# Altium PCB BTL-TKHT do.PcbDoc
Units mil, origin at the board's own origin, x right, y up, seen from the top; angles counter-clockwise.
Board outline 3880.03 x 2310.03 mil, 2 copper layers (Top Layer, Bottom Layer); 31 components, 26 nets, 131 pads, 0 vias.
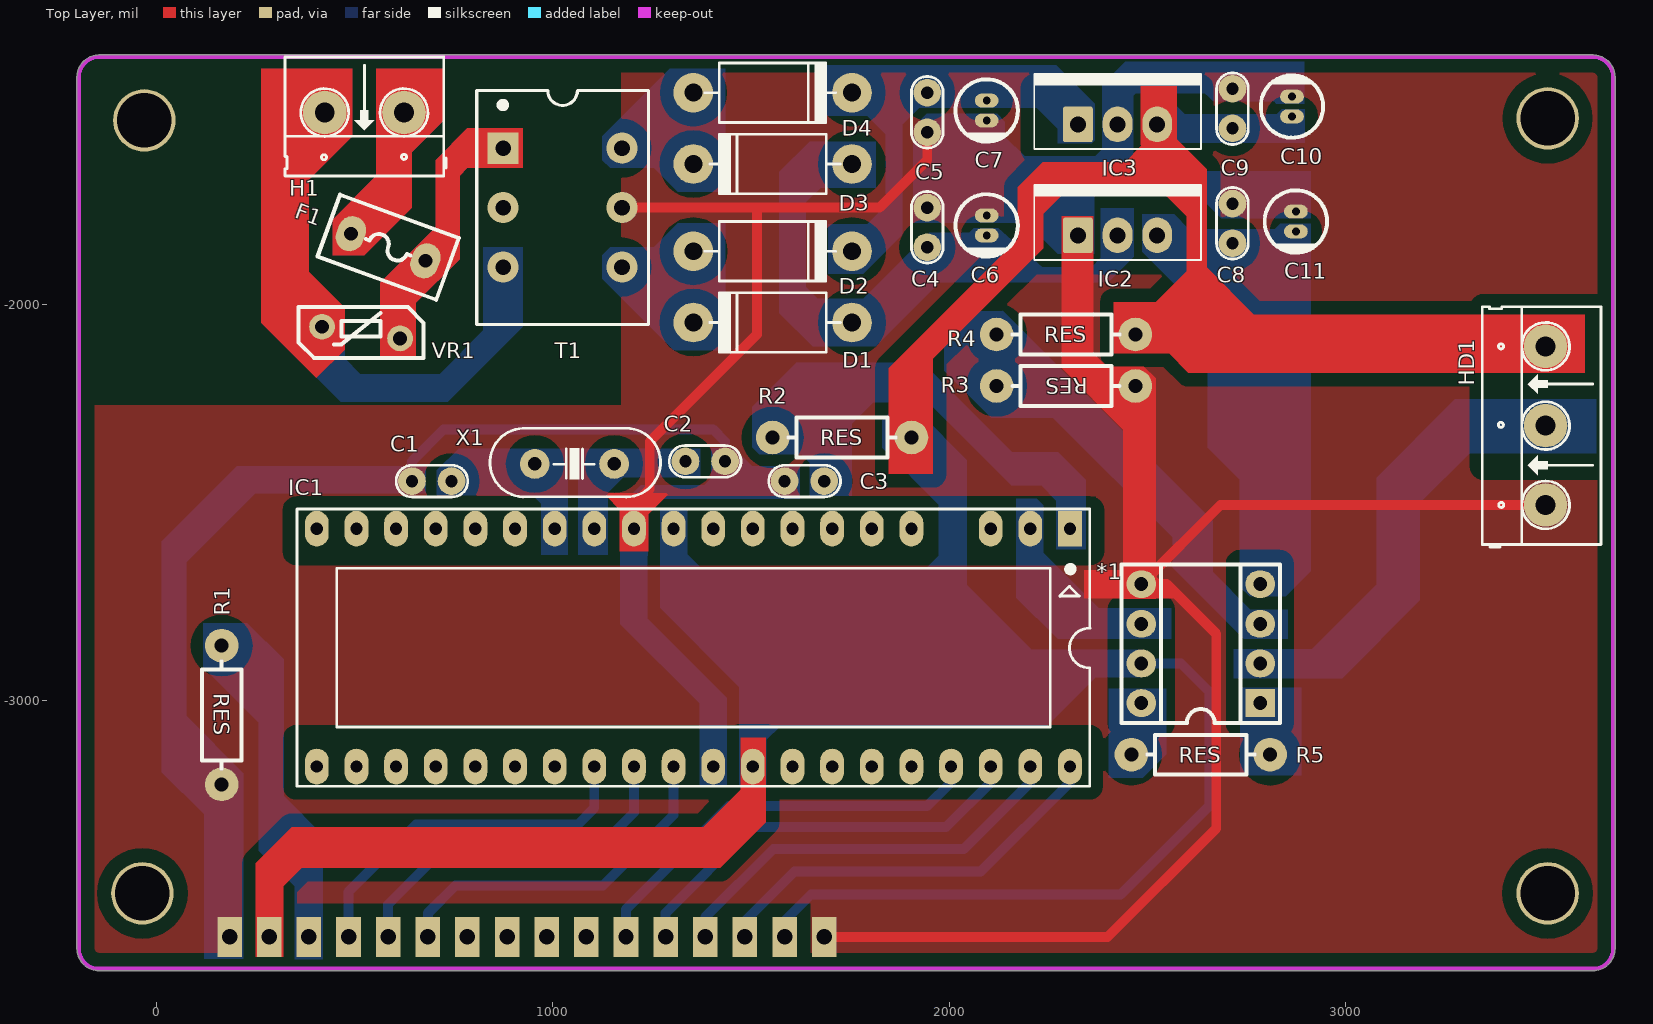
[diagram p0: Top Layer view]
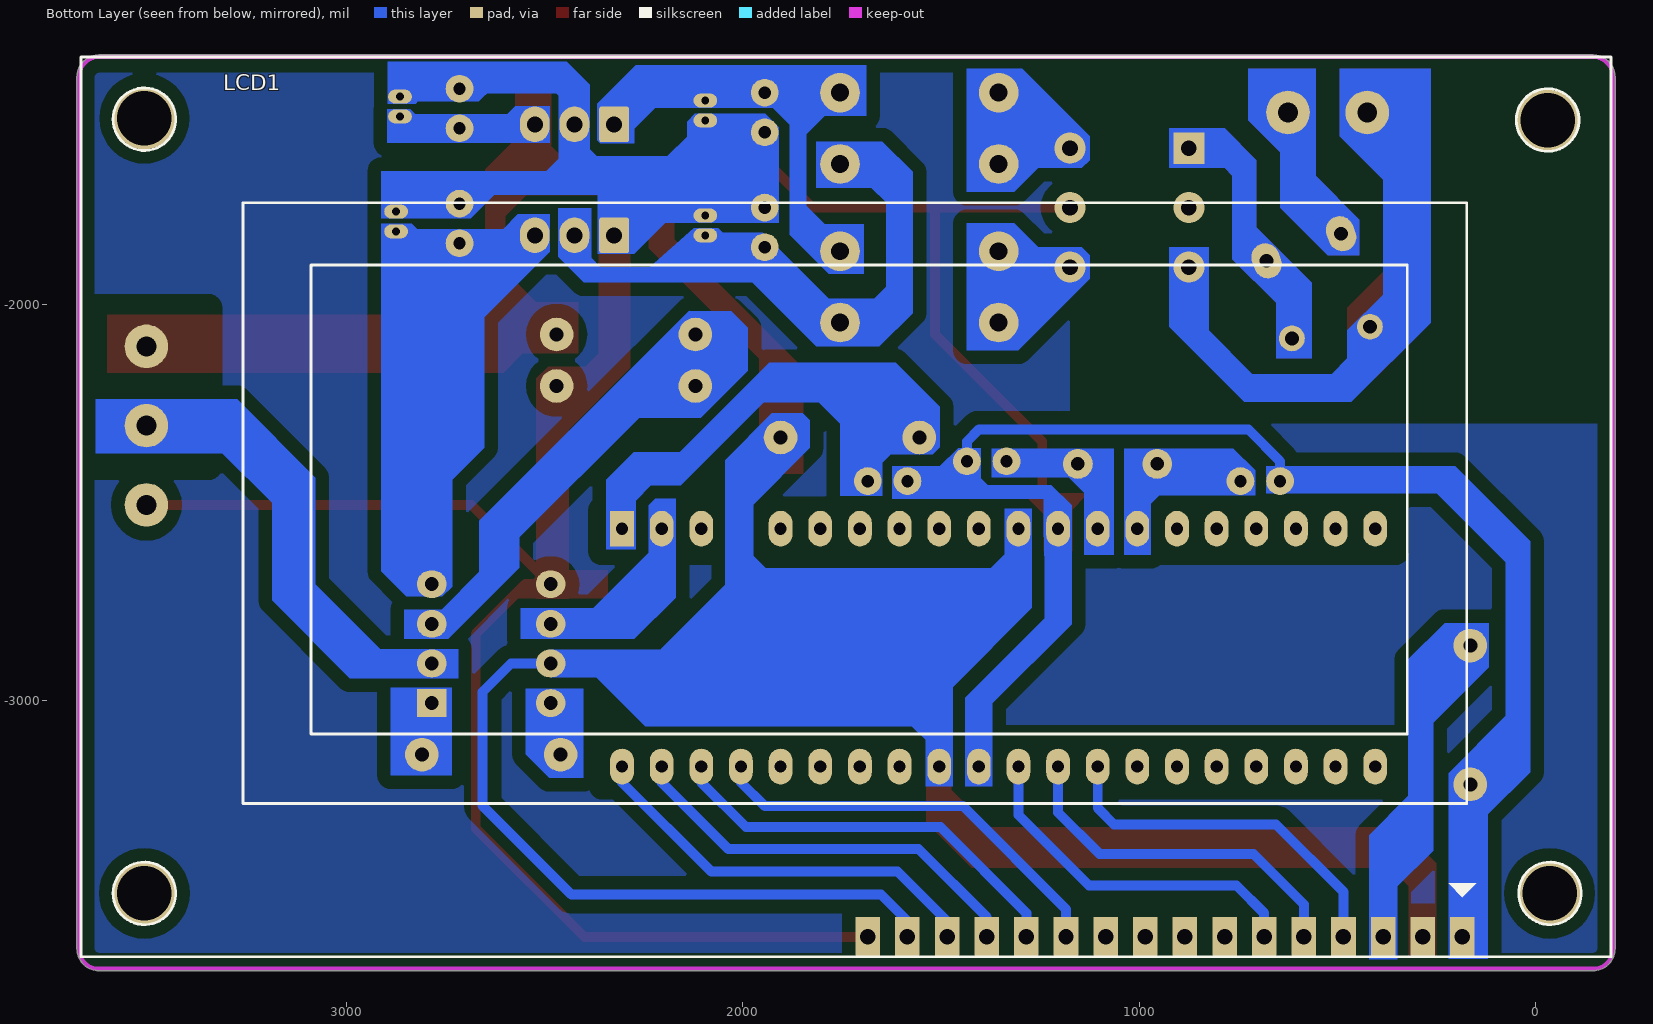
[diagram p1: Bottom Layer view, seen from below]
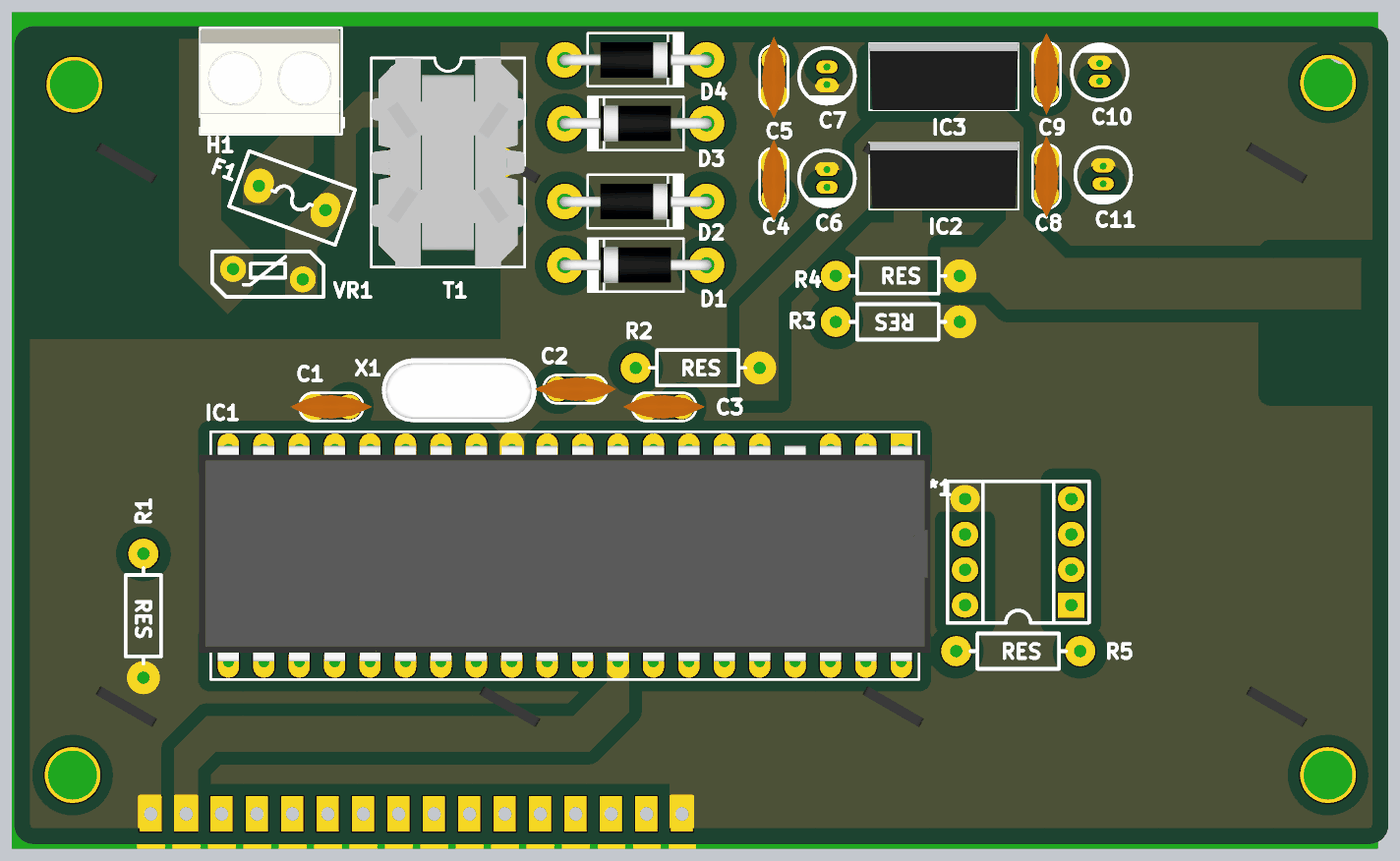
[diagram p2: 3D render of the assembled board from above, using the file's embedded part models]

## Layer stack, top to bottom
Top Solder: solder mask 0.4, Solder Resist, Dk 3.5
Top Layer: signal copper 1.4
Dielectric 1: dielectric 12.6, FR-4, Dk 4.8
Bottom Layer: signal copper 1.4
Bottom Solder: solder mask 0.4, Solder Resist, Dk 3.5

## Board outline
-145,-3681.01 cw(c-145,-3626) -200.02,-3626 -200.02,-1426 cw(c-145,-1426) -145,-1370.98 3625,-1370.98 cw(c3625,-1426) 3680.02,-1426 3680.02,-1576 cw(c3675,-1576) 3680.01,-1576.03 3680.02,-3626 cw(c3625,-3626) 3625,-3681.01

## Design rules (kind name [scope] priority, off if disabled: settings)
Clearance [All] p1: gap=35 ignorepadtopadclearanceinfootprint=FALSE
PlaneConnect [All] p1: planeconnectstyle=Direct reliefexpansion=20 reliefentries=4 reliefconductorwidth=10 reliefairgap=10
PolygonConnect [All] p1: connectstyle=Direct reliefconductorwidth=10 reliefentries=4 polygonreliefangle="90 Angle" airgapwidth=10
RoutingVias [All] p1: holewidth=28 width=50 viastyle="Through Hole" minholewidth=28 minwidth=50 maxholewidth=28 maxwidth=50
SolderMaskExpansion [All] p1: expansion=4
Width [All] p1: maxlimit=25 minlimit=15 preferedwidth=20 minimp=50.000000 maximp=50.000000 favimp=50.000000
29 further rules are at their usual default settings.

## Components (designator, comment, footprint, x,y, rotation, side; value= is the part's Value field where it differs from the comment)
*1 "INA128" INA128 2685,-2906 r180 top (schematic designator *)
C1 "Cap" Cap 695,-2446 r0 top (schematic designator C11)
C2 "Cap" Cap 1385,-2396 r180 top (schematic designator C10)
C3 "33uF" Cap 1635,-2446 r0 top (schematic designator C9)
C4 "1uF" Cap 1945,-1806 r90 top (schematic designator C5)
C5 "1uF" Cap 1945,-1516 r90 top (schematic designator C1)
C6 "33uF" POL_160mil 2095,-1801 r270 top
C7 "33uF" POL_160mil 2095,-1511 r270 top (schematic designator C2)
C8 "1uF" Cap 2715,-1796 r90 top
C9 "1uF" Cap 2715,-1506 r270 top (schematic designator C4)
C10 "33uF" POL_160mil 2865,-1501 r90 top (schematic designator C3)
C11 "33uF" POL_160mil 2875,-1791 r270 top (schematic designator C7)
D1 "Diode" Diode 1555,-2046 r90 top
D2 "Diode" Diode 1555,-1866 r270 top
D3 "Diode" Diode 1555,-1646 r90 top
D4 "Diode" Diode 1555,-1466 r270 top
F1 "Fuse" PUSE_3 585,-1856 r340 top (schematic designator F2)
H1 "HD_2" "Header 2" 525,-1476 r180 top
HD1 "HD_3" HEADER_3 4005,-2206 r90 top
IC1 "PIC 16F877A" DIP40/W0.6 2305,-2566 r180 top value=PIC16F877A (schematic designator IC3)
IC2 "LM7905" LM7905 2425,-1826 r0 top
IC3 "LM7805" LM7805 2425,-1546 r0 top (schematic designator IC1)
LCD1 "LCD 20x4A" LCD20X4A 185,-3596 r0 bottom (schematic designator LCD)
R1 "2.5k" RES 165,-3036 r270 top (schematic designator R4)
R2 "10k" RES 1730,-2336 r0 top (schematic designator R1)
R3 "120R" RES 2295,-2206 r180 top
R4 "120R" RES 2295,-2076 r0 top (schematic designator R2)
R5 "15R" RES 2635,-3136 r0 top
T1 "Transformer 2P3S" Transformer_3 1025,-1756 r0 top
VR1 "Varistor 360V" VARISTOR 516.57,-2071.24 r180 top
X1 "12Mhz" XT2 1055,-2402.69 r0 top value=4Mhz

## Footprints (in the part's own frame and the unit in brackets; to place one, negate y for a bottom-side part, rotate by r counter-clockwise, add the part's x,y. Pads: shape width x height; smd on the part's side, far side on the other; paste and mask are expansions set on the pad)
Cap [mil]
  round 70 hole 31: 1(-50,0) 2(50,0)
  silkscreen extent -90,-40 91,40, body extent -115,-33 115,33, height 265
Diode [mil]
  round 100 hole 45: A(0,-200) C(0,200)
  silkscreen extent -75,-171 75,159, body extent -50,-215 51,215, height 100
DIP40/W0.6 [mil] "40 PIN, W 600mil, Pin to pin 100mil"
  rect 60x90 hole 31: 1(0,0)
  oval 60x90 hole 31: 2(100,0) 3(200,0) 5(400,0) 6(500,0) 7(600,0) 8(700,0) 9(800,0) 10(900,0) 11(1000,0) 12(1100,0) 13(1200,0) 14(1300,0) 15(1400,0) 16(1500,0) 17(1600,0) 18(1700,0) 19(1800,0) 20(1900,0) 21(1900,600) 22(1800,600) 23(1700,600) 24(1600,600) 25(1500,600) 26(1400,600) 27(1300,600) 28(1200,600) 29(1100,600) 30(1000,600) 31(900,600) 32(800,600) 33(700,600) 34(600,600) 35(500,600) 36(400,600) 37(300,600) 38(200,600) 39(100,600) 40(0,600)
  round 0 on Top Paste: ""(300,0)
  silkscreen extent -50,-50 1950,650, body extent -82,-10 1982,600, height 224
"Header 2" [mil]
  round 110 hole 50: 1(-100,40) 2(100,40)
  silkscreen extent -206,-100 200,200, body extent -194,-95 200,200, height 394
HEADER_3 [mil]
  round 110 hole 50: 1(-300,500) 2(-100,500) 3(100,500)
  silkscreen extent -406,360 200,660, body extent -395,360 195,655, height 394
INA128 [mil]
  rect 75x70 hole 35: 1(-100,100)
  oval 75x70 hole 35: 2(-100,0) 3(-100,-100) 4(-100,-200) 5(200,-200) 6(200,-100) 7(200,0) 8(200,100)
  silkscreen extent -150,-250 250,150
LCD20X4A [mil] "LCD dipslay 20x4, 16 pin"
  rect 62x100 hole 39: 1(0,0) 2(100,0) 3(200,0) 4(300,0) 5(400,0) 6(500,0) 7(600,0) 8(700,0) 9(800,0) 10(900,0) 11(1000,0) 12(1100,0) 13(1200,0) 14(1300,0) 15(1400,0) 16(1500,0)
  round 157.48 hole 137.8: "Hole 0"(-220,-110) "Hole 0"(-215,-2060) "Hole 0"(3325,-2065) "Hole 0"(3325,-110)
  silkscreen extent -375,-2220 3485,50, body extent -392,-2264 3466,98, height 517
LM7805 [mil]
  rrect15% 75x90 hole 40 paste-73.23: 1(-100,0)
  oval 75x90 hole 40 paste-73.23: 2(0,0) 3(100,0)
  silkscreen extent -210,-63 210,127, body extent -210,-61 210,129, height 900
LM7905 [mil]
  rrect15% 75x90 hole 40 paste-73.23: 1(-100,0)
  oval 75x90 hole 40 paste-73.23: 2(0,0) 3(100,0)
  silkscreen extent -210,-63 210,127, body extent -210,-61 210,129, height 900
POL_160mil [mm]
  oval 0.9x1.524 hole 0.5: +(-0.635,0) -(0.635,0)
  silkscreen extent -2,-2 2,2
PUSE_3 [mil]
  oval 70x90 hole 35: 1(-100,0) 2(100,0)
  silkscreen extent -160,-83 159,83
RES [mil]
  round 85 hole 35: 1(-175,0) 2(175,0)
  silkscreen extent -135,-50 135,50
Transformer_3 [mm] "size 12x15mm"
  rect 2x2 hole 1: 1(-3.81,3.81)
  round 2 hole 1: 2(-3.81,0) 3(-3.81,-3.81) 4(3.81,-3.81) 5(3.81,0) 6(3.81,3.81)
  silkscreen extent -5.5,-7.5 5.5,7.5, body extent -5.5,-7.5 5.5,7.5, height 16.8
VARISTOR [mil]
  round 65 hole 35: 1(-98.43,14.76) 2(98.43,-14.76)
  silkscreen extent -157,-64 157,64
XT2 [mil] "Footpin for Crystal 2 pin"
  round 75 hole 34: 1(-100,0) 2(100,0)
  silkscreen extent -213,-83 217,90, body extent -216,-87 216,90, height 144

## Part data
C3 C4 C5 C8 C9: library part Cap
C6 C7 C10 C11: library part Pol-Cap, "T? di?n phân c?c"
IC1: library part PIC16F877-PU, "8K FLASH, 368B RAM, 256B EFROM", Copyright by=VanDungEvn
IC2: "Input Voltage: -7 - 35V, Ouput Voltage: -5V"
IC3: "Input Voltage: 7 - 35V, Ouput Voltage: 5V"
LCD1: library part LCD20x4A, "LCD dipslay 20 char, 4 line"
R1 R2 R3 R4 R5: library part RES, "di?n tr? size nh?"
VR1: library part Varistor
X1: library part XT2, "Crystal, 32.768 KHz, -40 to 85 degC, 3.2 x 1.5 x 0.9 mm SMD"

## Nets (pads, with @x,y where several pads share a name; then routed paths per layer and width w, separated by ;. In a path a pad name is that pad's centre, name@x,y a point inside that pad or via, vN(x,y) a via of type N, cw(c..) or ccw(c..) an arc to the next point about the centre after c; other vN are vias at no path point)
+5: *1.7 C9.2 C10.+ HD1.3 IC1.11 IC1.32 IC3.3 LCD1.2 LCD1.15 R2.2 R4.2 | length 8814.5
  Top Layer w25: LCD1.2 285,-3486 386,-3385 1399,-3385 1505,-3279 IC1.32 ; R2.2 1905,-2139 2205,-1839 2205,-1744 2243,-1706 2445,-1706 2525,-1626 IC3.3@2525,-1587 ; R4.2 2775,-2076 ; IC3.3 IC3.3@2525,-1587 ; HD1.3 3475,-2076 2775,-2076 ; IC3.3@2525,-1587 2625,-1687 2625,-1926 2775,-2076
  Bottom Layer w25: IC1.11 1305,-2746 1505,-2946 ; IC1.32 1505,-2946 ; LCD1.15 1585,-3556 1652,-3489 2433,-3489 2657,-3265 2657,-2978 2585,-2906 *1.7 1735,-2906 ; R2.2 2005,-2436 2005,-2636 1735,-2906 ; IC3.3 2535,-1556 C9.2 2835,-1556 C10.+ ; 1505,-2946 1695,-2946 1735,-2906
-5: *1.4 C8.1 C11.- IC2.3 | length 1259.7
  Bottom Layer w25: IC2.3 2545,-1846 C8.1 ; *1.4 2785,-1916 C8.1 ; C11.- 2845,-1846 C8.1
_toADC: *1.6 IC1.2 | length 438
  Bottom Layer w25: IC1.2 2205,-2666 2345,-2806 *1.6
D4: IC1.37 LCD1.11 | length 1062.5
  Bottom Layer w25: LCD1.11 1185,-3526 1445,-3266 1945,-3266 2005,-3206 IC1.37
D5: IC1.38 LCD1.12 | length 1056.7
  Bottom Layer w25: LCD1.12 1285,-3536 1502,-3319 1992,-3319 2105,-3206 IC1.38
D6: IC1.39 LCD1.13 | length 1050.8
  Bottom Layer w25: LCD1.13 1385,-3546 1557,-3374 2037,-3374 2205,-3206 IC1.39
D7: IC1.40 LCD1.14 | length 1045
  Bottom Layer w25: LCD1.14 1485,-3556 1610,-3431 2080,-3431 2305,-3206 IC1.40
EN: IC1.30 LCD1.6 | length 904.7
  Bottom Layer w25: LCD1.6 685,-3536 755,-3466 1127,-3466 1305,-3288 IC1.30
GND: *1.5 C1.1 C2.1 C3.1 C4.2 C5.1 C6.+ C7.- C8.2 C9.1 C10.- C11.+ HD1.1 IC1.12 IC1.31 IC2.1 IC3.2 LCD1.1 LCD1.16 R1.2 R3.1 T1.5 | length 11861.8
  Top Layer w25: T1.5 1515,-1756 ; IC1.12 1205,-2506 1245,-2466 1245,-2346 1515,-2076 1515,-1756 ; LCD1.16 2400,-3596 2674,-3322 2674,-2831 2549,-2706 *1.5 ; C5.1 1945,-1636 1825,-1756 1515,-1756 ; IC2.1 2325,-2126 2405,-2206 R3.1 2470,-2691 *1.5 ; HD1.1 2685,-2506 *1.5
  Bottom Layer w25: LCD1.1 165,-3576 R1.2 55,-3101 55,-2636 245,-2446 C1.1 645,-2396 725,-2316 1405,-2316 1435,-2346 C2.1 ; IC1.31 1405,-2996 1205,-2796 IC1.12 1205,-2506 1235,-2476 1395,-2476 1435,-2436 C2.1 ; C3.1 1485,-2446 C2.1 ; C7.- 2065,-1566 ; IC2.1 2275,-1776 C6.+ 2075,-1756 C4.2 C5.1 2065,-1566 ; C10.- 2845,-1456 C9.1 2465,-1456 2425,-1496 IC3.2 2425,-1616 2395,-1646 ; C11.+ 2855,-1746 C8.2 2665,-1696 2445,-1696 2395,-1646 ; 2065,-1566 2145,-1646 2395,-1646
Net*_1: *1.1 R5.2 | length 140.4
  Bottom Layer w25: *1.1 2785,-3111 R5.2
Net*_8: *1.8 R5.1 | length 140.4
  Bottom Layer w25: R5.1 2485,-3111 *1.8
NetC1_2: C5.2 C7.+ D2.C D4.C IC3.1 | length 1094.3
  Bottom Layer w25: D2.C 1865,-1756 1865,-1576 D4.C C5.2 2075,-1466 C7.+ 2265,-1486 IC3.1
NetC5_1: C4.1 C6.- D1.A D3.A IC2.2 | length 1482
  Bottom Layer w25: D3.A 1682,-1646 1607,-1721 1607,-1972 1681,-2046 D1.A C4.1 2065,-1856 C6.- 2195,-1926 2375,-1926 2425,-1876 IC2.2
NetC9_2: C3.2 IC1.1 R2.1 | length 1198.1
  Bottom Layer w25: C3.2 1685,-2386 1635,-2336 R2.1 1665,-2226 1977,-2226 2167,-2416 2225,-2416 2305,-2496 IC1.1 IC1.1@2295,-2566
NetC10_2: C2.2 IC1.13 X1.2 | length 366.8
  Bottom Layer w25: IC1.13 1105,-2452.69 X1.2 1328.31,-2402.69 C2.2
NetC11_2: C1.2 IC1.14 X1.1 | length 412
  Bottom Layer w25: C1.2 911.69,-2446 X1.1 1005,-2452.69 IC1.14
NetD1_C: D1.C D2.A T1.4 | length 376.6
  Bottom Layer w25: T1.4 1315,-1906 D2.A D1.C
NetD3_C: D3.C D4.A T1.6 | length 376.6
  Bottom Layer w25: T1.6 1315,-1606 D3.C D4.A
NetF2_1: F1.1 H1.1 | length 349.7
  Bottom Layer w25: F1.1@505,-1816 605,-1716 605,-1536 H1.1
NetF2_2: F1.2 T1.1 VR1.1 | length 640.4
  Bottom Layer w25: VR1.1 615,-1966 705,-1876 745,-1836 745,-1646 785,-1606 T1.1
NetH1_2: H1.2 T1.3 VR1.2 | length 1396.5
  Bottom Layer w25: H1.2 355,-1586 355,-2006 405.47,-2056.47 VR1.2 418.15,-2139.15 495,-2216 725,-2216 795,-2146 795,-2116 875,-2036 T1.3
NetLCD_3: LCD1.3 R1.1 | length 826.1
  Bottom Layer w25: R1.1 285,-2981 285,-3318 385,-3418 LCD1.3
RS: IC1.28 LCD1.4 | length 926.4
  Bottom Layer w25: LCD1.4 485,-3482 655,-3312 1064,-3312 1105,-3271 IC1.28
RW: IC1.29 LCD1.5 | length 914.1
  Bottom Layer w25: LCD1.5 585,-3514 712,-3387 1100,-3387 1205,-3282 IC1.29
SIGNAL+: *1.3 R3.2 R4.1 | length 1096.2
  Bottom Layer w25: R4.1 R3.2 2245,-2206 2615,-2576 2615,-2666 2755,-2806 *1.3
SIGNAL-: *1.2 HD1.2 | length 1138.7
  Bottom Layer w25: *1.2 2962,-2906 3148,-2720 3148,-2462 3304,-2306 HD1.2 HD1.2@3505,-2325
pads on no net: "LCD1.Hole 0" IC1. IC1.3 IC1.5 IC1.6 IC1.7 IC1.8 IC1.9 IC1.10 IC1.15 IC1.16 IC1.17 IC1.18 IC1.19 IC1.20 IC1.21 IC1.22 IC1.23 IC1.24 IC1.25 IC1.26 IC1.27 IC1.33 IC1.34 IC1.35 IC1.36 LCD1.7 LCD1.8 LCD1.9 LCD1.10 T1.2

## Polygon pours and split planes (outlines as drawn)
no net on Top Overlay (solid): 2435,-2768
no net on Top Overlay (solid): 2419,-2768
no net on Bottom Layer (solid, pour order 4): 1175,-1376 3575,-1376 cw(c3575,-1476) 3675,-1476 3675,-3576 cw(c3575,-3576) 3575,-3676 -95,-3676 cw(c-95,-3576) -195,-3576 -195,-2301 1175,-2301
GND on Top Layer (solid, pour order 2): 3675,-3574 cw(c3575,-3574) 3575,-3674 -95,-3674 cw(c-95,-3574) -195,-3574 -195,-2254 1173,-2254 1173,-1376 3575,-1376 cw(c3575,-1476) 3675,-1476

## Keep-outs
Keep-Out Layer:
  lines w10: 3675,-1576 3675,-1426 ccw(c3625,-1426) 3625,-1376 -145,-1376 ccw(c-145,-1426) -195,-1426 -195,-3626 ccw(c-145,-3626) -145,-3676 3625,-3676 ccw(c3625,-3626) 3675,-3626 3675,-1476

## Other copper
Top Layer:
  region net NetH1_2: 265,-2046 404,-2185 475,-2114 475,-2008 385,-1918 385,-1686 495,-1576 495,-1406 265,-1406
  region net NetF2_1: 555,-1406 725,-1406 725,-1536 645,-1616 645,-1756 525,-1876 445,-1876 445,-1786 555,-1676
  region net NetF2_2: 925,-1556 925,-1656 785,-1656 765,-1676 765,-1886 655,-1996 655,-2136 565,-2136 565,-1946 705,-1806 705,-1636 785,-1556
  region net GND: 2576,-2742 2341,-2742 2341,-2671 2507.48,-2671
  region net GND: 1169.67,-2517.67 1135,-2483 1141,-2477 1287,-2477 1290,-2480 1241,-2529 1241,-2623 1169,-2623 1169,-2508
  region net +5: 1474,-3093 1474,-3225 1380,-3319 342,-3319 251,-3410 251,-3646 320,-3646 320,-3437 336,-3421 1423,-3421 1537,-3307 1537,-3093
  region net GND: 2284,-1778 2364,-1778 2364,-2123 2398,-2157 2491,-2157 2521,-2187 2521,-2743 2440,-2743 2440,-2316 2284,-2160
  region net +5: 2485,-1600 2444,-1641 2236,-1641 2173,-1704 2173,-1836 1848,-2161 1848,-2428 1959,-2428 1959,-2137 2238,-1858 2238,-1771 2284,-1725 2547,-1725 2601,-1779 2622,-1758 2622,-1650 2599,-1650 2529,-1580
  region net +5: 3604,-2026 3604,-2172 2604,-2172 2555,-2123 2415,-2123 2415,-1995 2522,-1995 2600,-1917 2600,-1715 2483,-1598 2483,-1450 2574,-1450 2574,-1583 2650,-1659 2650,-1907 2769,-2026
  region: 2877,-1798
Bottom Layer:
  region net NetF2_2: 925,-1556 925,-1656 785,-1656 765,-1676 765,-1886 655,-1996 655,-2136 565,-2136 565,-1946 705,-1806 705,-1636 785,-1556
  region net NetF2_1: 555,-1406 725,-1406 725,-1536 645,-1616 645,-1756 525,-1876 445,-1876 445,-1786 555,-1676
  region net NetH1_2: 265,-2046 465,-2246 735,-2246 925,-2056 925,-1856 825,-1856 825,-1956 825,-2066 715,-2176 515,-2176 475,-2136 475,-2066 385,-1976 385,-1686 495,-1576 495,-1406 265,-1406
  region net SIGNAL-: 2734,-2967 2888,-2967 2888,-3188 2735,-3188 2735,-2973
  region net NetLCD_3: 119,-2916 259,-3056 259,-3378 349,-3468 349,-3652 420,-3652 420,-3339 321,-3240 321,-2895 230,-2804 119,-2804
  region: 220,-3651 220,-3183 75,-3038 75,-2651 250,-2476 680,-2476 680,-2409 203,-2409 14,-2598 14,-3180 121,-3287 121,-3651
  region: 1171,-2807 1371,-3007 1371,-3216 1439,-3216 1439,-2992 1239,-2792 1239,-2659.33 1241,-2562 1241,-2491 1623,-2491 1623,-2409 1503,-2409 1457,-2363 1400,-2363 1400,-2439 1383,-2456 1222,-2456 1171,-2507
  region net +5: 1574,-3064 2247,-3064 2370,-2941 2483,-2941 2489,-2871 2209,-2871 2045,-2707 2045,-2393 1927,-2275 1849,-2275 1831,-2293 1831,-2362 1974,-2505 1974,-2634 1942,-2666 1375,-2666 1339,-2630 1339,-2516 1271,-2516 1271,-2766 1471,-2966 1471,-3216 1539,-3216 1539,-3099
  region net Net*_8: 2548,-2970 2548,-3135 2489,-3194 2403,-3194 2403,-2970
  region: 2048,-2712
  region: 2045,-2707
  region: 2483,-2941
  region: 1065,-2632 1139,-2632 1139,-2475 1178,-2436 1372,-2436 1372,-2364 1065,-2364
  region net NetC11_2: 708,-2482 950,-2482 971,-2503 971,-2632 1038,-2632 1038,-2364 763,-2364 708,-2419
  region net SIGNAL-: 2718,-2870 2718,-2943 2992,-2943 3188,-2747 3188,-2501 3313,-2376 3633,-2376 3633,-2240 3276,-2240 3079,-2437 3079,-2706 2915,-2870
  region: 3521,-2236
  region net _toADC: 2377,-2767 2237,-2627 2237,-2507 2221,-2491 2170,-2491 2170,-2740 2274,-2844 2561,-2844 2561,-2767
  region net NetC9_2: 1649,-2400 1627,-2378 1521,-2378 1503,-2360 1503,-2259 1614,-2148 1934,-2148 2159,-2373 2275,-2373 2345,-2443 2345,-2618 2271,-2618 2271,-2496 2232,-2457 2157,-2457 1947,-2247 1809,-2247 1755,-2301 1755,-2483 1649,-2483
  region: 1649,-2445
  region net SIGNAL+: 2135,-2018 2029,-2018 1988,-2059 1988,-2168 2106,-2286 2262,-2286 2564,-2588 2564,-2664 2744,-2844 2855,-2844 2855,-2770 2760,-2770 2665,-2675 2665,-2546 2135,-2016
  region net -5: 2835,-1797 2822,-1810 2605,-1810 2568,-1773 2488,-1773 2488,-1867 2653,-2032 2653,-2362 2733,-2442 2733,-2712 2758,-2737 2849,-2737 2913,-2673 2913,-1797
  region net GND: 1910,-1794 2196,-1794 2274,-1872 2366,-1872 2366,-1723 2627,-1723 2687,-1783 2913,-1783 2913,-1664 2496,-1664 2465,-1633 2465,-1456 2634,-1456 2666,-1488 2820,-1488 2826,-1494 2896,-1494 2896,-1388 2445,-1388 2387,-1446 2387,-1609 2369,-1627 2191,-1627 2141,-1577 2141,-1539 2121,-1519 1944,-1519 1910,-1553
  region net GND: 2457,-1594
  region net +5: 2897,-1592 2897,-1508 2839,-1508 2827,-1520 2595,-1520 2575,-1500 2487,-1500 2487,-1592
  region net NetC1_2: 1925,-1504 2221,-1504 2274,-1557 2274,-1594 2360,-1594 2368,-1586 2368,-1494 2271,-1397 1689,-1397 1689,-1524 1793,-1524 1840,-1571 1840,-1751 1793,-1798 1695,-1798 1695,-1923 1784,-1923 1882,-1825 1882,-1547
  region net NetC5_1: 1572,-1666 1572,-2022 1656,-2106 1815,-2106 1977,-1944 2402,-1944 2466,-1880 2466,-1758 2383,-1758 2383,-1883 2360,-1906 2235.63,-1906 2124.63,-1808 2062,-1808 2051,-1819 1950,-1819 1783,-1986 1669,-1986 1639,-1956 1639,-1743 1676,-1706 1815,-1706 1815,-1590 1648,-1590
  region: 1255,-1856 1315,-1796 1435,-1796 1435,-2116 1305,-2116 1125,-1936 1125,-1876 1145,-1856
  region: 1435,-1716 1435,-1406 1295,-1406 1125,-1576 1125,-1636 1145,-1656 1255,-1656 1315,-1716

## Text inside footprints (layer, text, board x,y; h text height)
R1: Top Overlay "RES" at 145,-2981 h40 r270
R2: Top Overlay "RES" at 1675,-2356 h40
R3: Top Overlay "RES" at 2350,-2186 h40 r180
R4: Top Overlay "RES" at 2240,-2096 h40
R5: Top Overlay "RES" at 2580,-3156 h40